# Altium PCB LCD_Board_2.PcbDoc (part 1 of 2)
Units mm, origin at the board's own origin, x right, y up, seen from the top; angles counter-clockwise.
Board outline 96.52 x 66.04 mm, 2 copper layers (Top Layer, Bottom Layer), stack 1.569 mm thick; 78 components, 60 nets, 337 pads, 81 vias.
Unrouted connection lines stored in the file: 77.
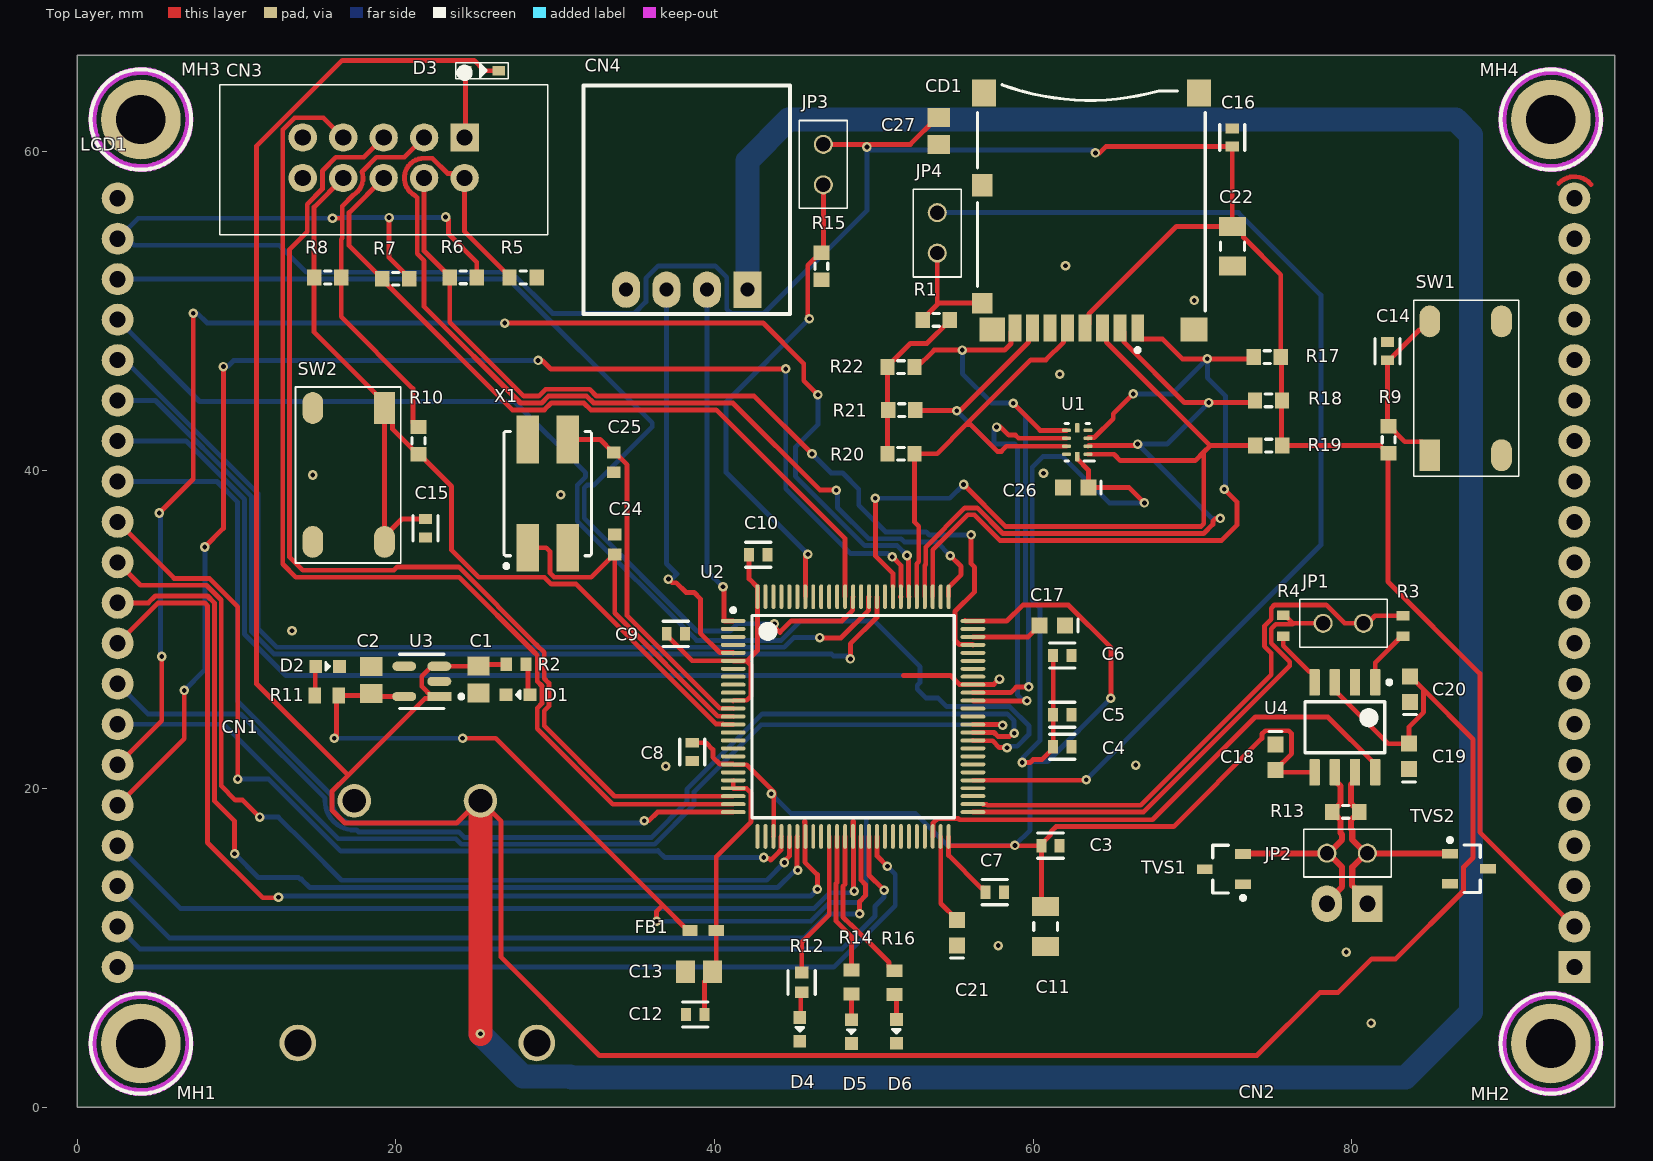
[diagram p0: Top Layer view]
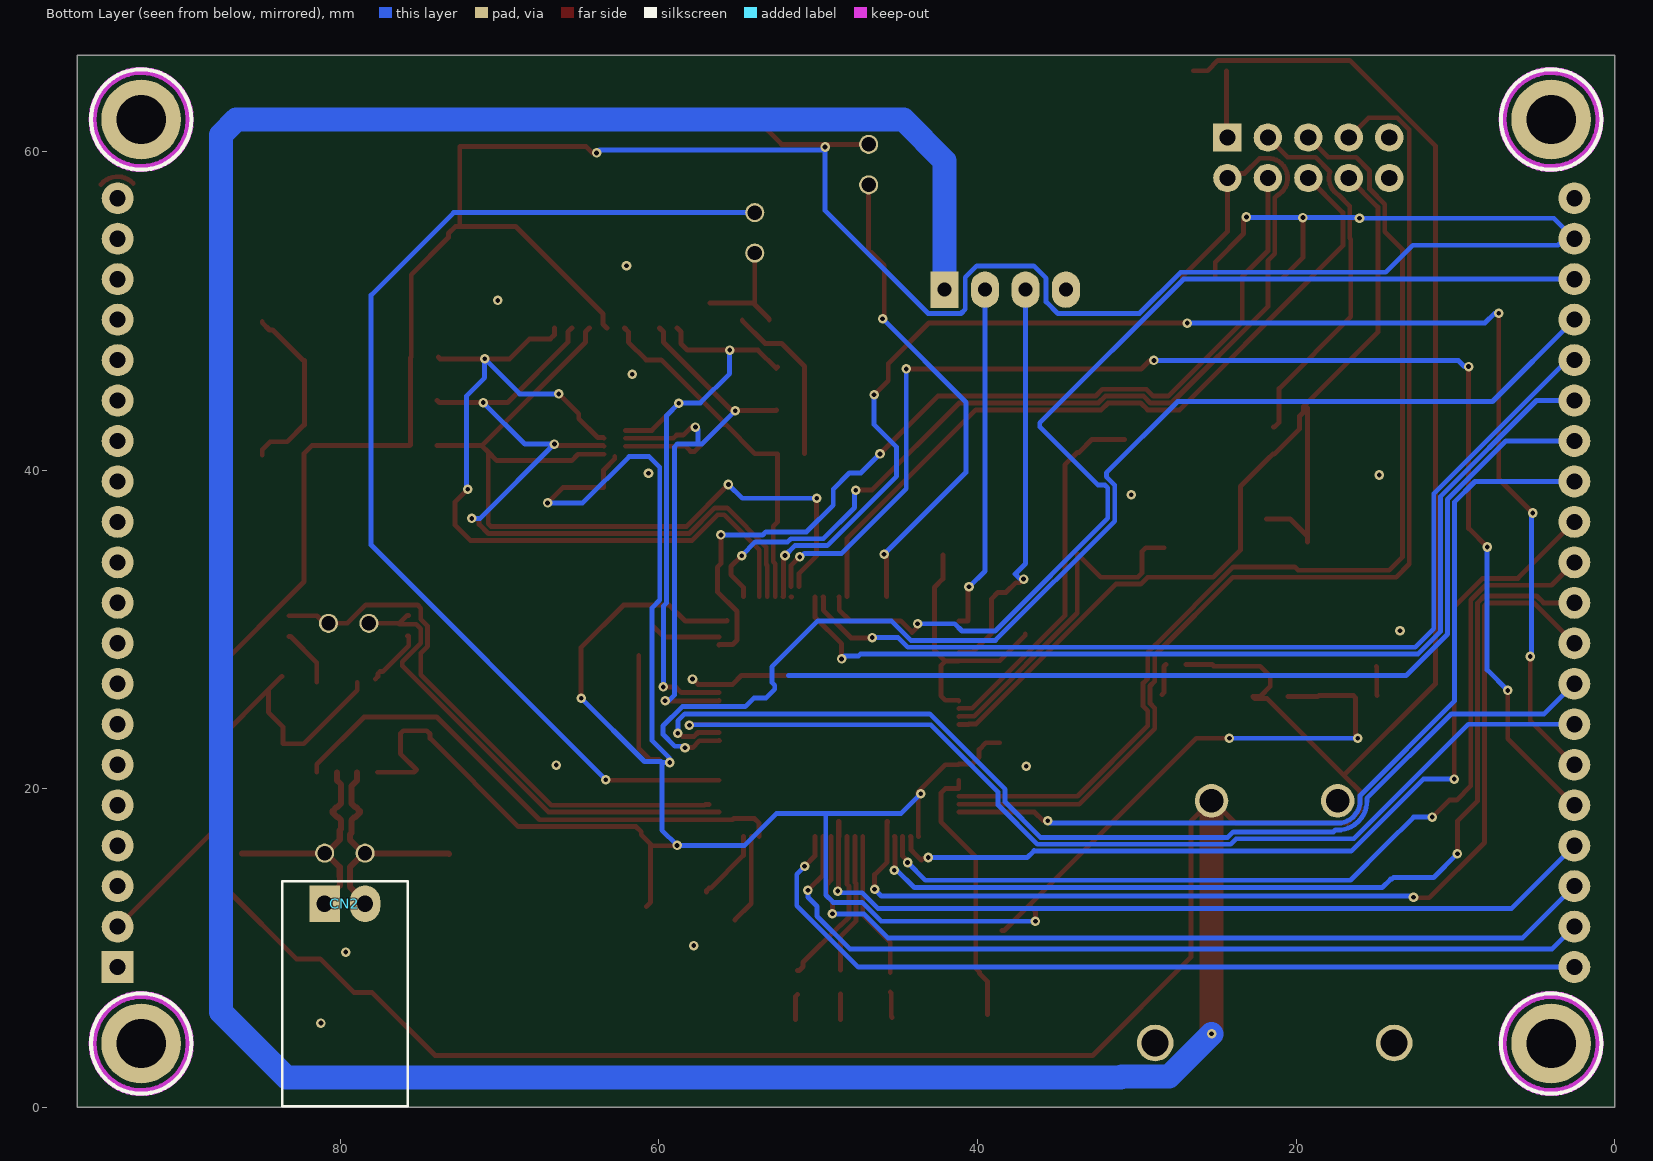
[diagram p1: Bottom Layer view, seen from below]
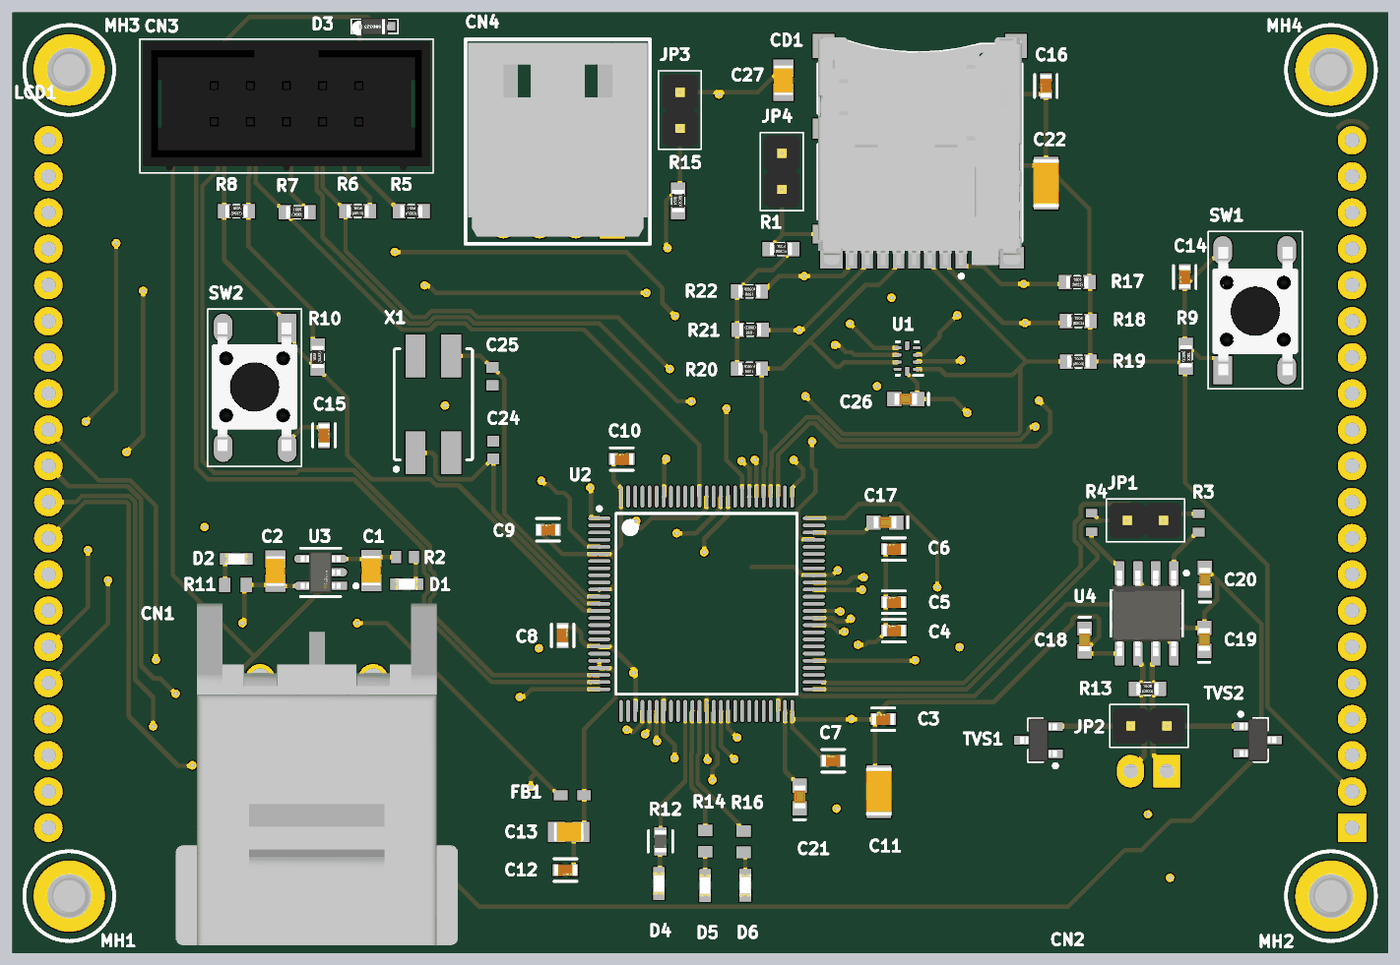
[diagram p2: 3D render of the assembled board from above, using the file's embedded part models]

## Layer stack, top to bottom
Top Solder: solder mask 0.0254, SM-001, Dk 4
Top Layer: signal copper 0.035
Dielectric 1: core 1.4986, Core-043, Dk 4.3
Bottom Layer: signal copper 0.035
Bottom Solder: solder mask 0.0254, SM-001, Dk 4

## Board outline
0,0 0,66.04 96.52,66.04 96.52,0

## Design rules (kind name [scope] priority, off if disabled: settings)
Clearance [All] p1: gap=0.254 ignorepadtopadclearanceinfootprint=TRUE except(0: Arc-Hole Track-Hole SMDPad-Hole THPad-Hole Via-Hole Fill-Hole Poly-Hole Region-Hole Text-Hole; 0.127: Arc-Arc Arc-Track Arc-Fill Arc-Poly Arc-Region Track-Track Track-Fill Track-Poly Track-Region SMDPad-SMDPad SMDPad-Fill SMDPad-Poly SMDPad-Region Fill-Fill Fill-Poly Fill-Region Poly-Poly Poly-Region Region-Region; 0.2: Arc-SMDPad Arc-THPad Track-SMDPad Track-THPad; 0.54: THPad-THPad THPad-Fill THPad-Poly THPad-Region)
ComponentClearance [All] p1: gap=0.254 collisioncheckmode=3 verticalgap=2540 showdistances=FALSE
DiffPairsRouting [All] p1: maxlimit=0.254 minlimit=0.254 mostfreqgap=0.254 toplayer_minwidth=0.381 toplayer_maxwidth=0.381 toplayer_prefwidth=0.381 bottomlayer_minwidth=0.381 bottomlayer_maxwidth=0.381 bottomlayer_prefwidth=0.381 substack1={F4272AB1-54B0-470A-9504-83E776850737} toplayer_{f4272ab1-54b0-470a-9504-83e776850737}_minwidth=0.381 toplayer_{f4272ab1-54b0-470a-9504-83e776850737}_maxwidth=0.381 toplayer_{f4272ab1-54b0-470a-9504-83e776850737}_prefwidth=0.381 bottomlayer_{f4272ab1-54b0-470a-9504-83e776850737}_minwidth=0.381 bottomlayer_{f4272ab1-54b0-470a-9504-83e776850737}_maxwidth=0.381 bottomlayer_{f4272ab1-54b0-470a-9504-83e776850737}_prefwidth=0.381 substack2={EA747935-8F46-47CB-AC01-D5D24FED16BF} toplayer_{ea747935-8f46-47cb-ac01-d5d24fed16bf}_minwidth=0.381 toplayer_{ea747935-8f46-47cb-ac01-d5d24fed16bf}_maxwidth=0.381 toplayer_{ea747935-8f46-47cb-ac01-d5d24fed16bf}_prefwidth=0.381 bottomlayer_{ea747935-8f46-47cb-ac01-d5d24fed16bf}_minwidth=0.381 bottomlayer_{ea747935-8f46-47cb-ac01-d5d24fed16bf}_maxwidth=0.381 bottomlayer_{ea747935-8f46-47cb-ac01-d5d24fed16bf}_prefwidth=0.381 substack3={627328DA-F39E-4214-9B17-F8342BBCFC59} toplayer_{627328da-f39e-4214-9b17-f8342bbcfc59}_minwidth=0.381 toplayer_{627328da-f39e-4214-9b17-f8342bbcfc59}_maxwidth=0.381 toplayer_{627328da-f39e-4214-9b17-f8342bbcfc59}_prefwidth=0.381 bottomlayer_{627328da-f39e-4214-9b17-f8342bbcfc59}_minwidth=0.381 bottomlayer_{627328da-f39e-4214-9b17-f8342bbcfc59}_maxwidth=0.381 bottomlayer_{627328da-f39e-4214-9b17-f8342bbcfc59}_prefwidth=0.381 substack4={10BF810F-735D-4ED9-9BE4-32E110BF4F33} toplayer_{10bf810f-735d-4ed9-9be4-32e110bf4f33}_minwidth=0.381 toplayer_{10bf810f-735d-4ed9-9be4-32e110bf4f33}_maxwidth=0.381 toplayer_{10bf810f-735d-4ed9-9be4-32e110bf4f33}_prefwidth=0.381 bottomlayer_{10bf810f-735d-4ed9-9be4-32e110bf4f33}_minwidth=0.381 bottomlayer_{10bf810f-735d-4ed9-9be4-32e110bf4f33}_maxwidth=0.381 bottomlayer_{10bf810f-735d-4ed9-9be4-32e110bf4f33}_prefwidth=0.381 maxuncoupledlength=12.7
PolygonConnect [All] p1: connectstyle=Relief reliefconductorwidth=0.254 reliefentries=4 polygonreliefangle="90 Angle" airgapwidth=0.254
RoutingVias [All] p1: holewidth=0.3 width=0.6 viastyle="Through Hole" minholewidth=0.2 minwidth=0.45 maxholewidth=1.5 maxwidth=3
SolderMaskExpansion [All] p1: expansion=0.102 istentingtop=FALSE
Width [All] p1: maxlimit=2 minlimit=0.127 preferedwidth=0.305 toplayer_prefwidth=0.305 substack1={F4272AB1-54B0-470A-9504-83E776850737} substack2={EA747935-8F46-47CB-AC01-D5D24FED16BF} substack3={627328DA-F39E-4214-9B17-F8342BBCFC59} substack4={10BF810F-735D-4ED9-9BE4-32E110BF4F33} minimp=50.000000 maximp=50.000000 favimp=50.000000
28 further rules are at their usual default settings.

## Classes and differential pairs
component class U_micro: C3 C4 C5 C6 C7 C8 C9 C10 C11 C12 C13 C14 C15 C17 C21 C24 C25 CN3 D3 D4 D5 D6 FB1 JP3 MH1 MH2 MH3 MH4 R5 R6 R7 R8 R9 R10 R12 R14 R15 R16 SW1 SW2 U2 X1
component class Power: C1 C2 CN1 D1 D2 R2 R11 U3
component class LED_LCD: C16 C22 C26 C27 CD1 CN4 JP4 R1 R17 R18 R19 R20 R21 R22 U1
component class "CAN interface": C18 C19 C20 CAN1 CN2 J1 JP1 JP2 R3 R4 R13 TVS1 TVS2 U4
differential pair CAN2: +CAN2_N -CAN2_P

## Components (designator, comment, footprint, x,y, rotation, side; value= is the part's Value field where it differs from the comment)
C1 "CL21B105KBFNNNG" "0803 CAP" 25.187,26.858 r270 top
C2 "CL21B105KBFNNNG" "0803 CAP" 18.456,26.819 r90 top
C3 "CL10B104JB8NNNC" FP-CL10-0_1-MFG#1 61.096,16.418 r180 top
C4 "CL10B104JB8NNNC" FP-CL10-0_1-MFG#1 61.84,22.631 r180 top
C5 "CL10B104JB8NNNC" FP-CL10-0_1-MFG#1 61.84,24.638 r180 top
C6 "CL10B104JB8NNNC" FP-CL10-0_1-MFG#1 61.84,28.359 r180 top
C7 "CL10B104JB8NNNC" FP-CL10-0_1-MFG#2 57.591,13.5 r180 top
C8 "CL10B104JB8NNNC" FP-CL10-0_1-MFG#2 38.608,22.305 r90 top
C9 "CL10B104JB8NNNC" FP-CL10-0_1-MFG#2 37.583,29.718 r180 top
C10 "CL10B104JB8NNNC" FP-CL10-0_1-MFG#1 42.757,34.684 r180 top
C11 "CL31B106KBHNNNE" CAPC3216X180X50LL20T30 60.795,11.348 r90 top
C12 "CL10B104JB8NNNC" FP-CL10-0_1-MFG#1 38.806,5.829 r0 top
C13 "CL21B105KBFNNNG" "0803 CAP" 39.039,8.509 r0 top
C14 "CL10B104JB8NNNC" FP-CL10-0_1-MFG#1 82.245,47.463 r270 top
C15 "CL10B104JB8NNNC" FP-CL10-0_1-MFG#1 21.869,36.351 r90 top
C16 "CL10B104JB8NNNC" FP-CL10-0_1-MFG#1 72.504,60.873 r270 top
C17 "2.2uF, 50V, 0603 SMD, X5R, Ceramic" "CAPC1608N(0603\")" 61.214,30.239 r180 top value=2.2µF
C18 "0.1μF" "CAPC1608N(0603\")" 75.222,21.982 r270 top
C19 "1μF" "CAPC1608N(0603\")" 83.604,22.02 r90 top
C20 "0.1μF" "CAPC1608N(0603\")" 83.668,26.249 r90 top
C21 "2.2uF, 50V, 0603 SMD, X5R, Ceramic" "CAPC1608N(0603\")" 55.232,10.96 r90 top value=2.2µF
C22 "CL31B106KBHNNNE" CAPC3216X180X50LL20T30 72.517,54.044 r90 top
C24 "16pF Ceramic 50V 5% 0603" CAPC1608X90X35LL10T15 33.744,35.316 r270 top
C25 "16pF Ceramic 50V 5% 0603" CAPC1608X90X35LL10T15 33.68,40.485 r90 top
C26 "10 nF, 50V 0603 SMD, Ceramic" "CAPC1608N(0603\")" 62.675,38.898 r180 top value=10nF
C27 "CL21B105KBFNNNG" "0803 CAP" 54.089,61.276 r90 top
CD1 "502774-0891" MOLX-502774-0891_V 63.665,56.299 r180 top
CN1 "2x1, Male header, Right Angle, Latch holder" "2X1 Power Connector 90 degrees" 25.314,19.238 r180 top
CN2 "1x2 Shrouded Right Angle" "2X1 Female Header" 80.986,12.776 r90 bottom
CN3 "ST Debug Header 10-pin THT" "10-pin shrouded header THT" 24.32,60.871 r180 top
CN4 "Header, Male, 1x4, RA, Pitch 0.1\" (2.54mm)" "HEADER, MALE, SHROUDED, 4x1, PITCH 0.1\" (2.54mm), RA" 42.075,51.321 r270 top
D1 "LT Q39G-Q1OO-25-1" FP-LB_Q39E-MFG 27.673,25.895 r0 top
D2 "LT Q39G-Q1OO-25-1" FP-LB_Q39E-MFG 15.723,27.673 r180 top
D3 "CUS08F30,H3F" SC-76 25.417,65.062 r0 top
D4 "LSQ976-NR-1" FP-LB_Q39E-MFG 45.364,4.889 r90 top
D5 "LT Q39G-Q1OO-25-1" FP-LB_Q39E-MFG 48.603,4.75 r90 top
D6 "LBQ39E-N1OO-35-1" FP-LB_Q39E-MFG 51.422,4.763 r90 top
FB1 "BLM18AG601SN1D" MURA-BLM18-F-H1-CHIP-2_V 39.291,11.087 r0 top
JP1 "1x2 Male Header" "2X1 Males Header" 80.747,30.377 r180 top
JP2 "1x2 Male Header" "2X1 Males Header" 80.988,15.951 r180 top
JP3 "1x2 Male Header" "2X1 Males Header" 46.838,60.439 r270 top
JP4 "1x2 Male Header" "2X1 Males Header" 53.988,53.618 r90 top
LCD1 "Adafruit 2050" LCD_touchscreen_tft 93.98,8.801 r180 top locked
MH1 "Mount_Hole_3mm" Mount-Hole_3mm 4,4 r0 top locked
MH2 "Mount_Hole_3mm" Mount-Hole_3mm 92.5,4 r0 top locked
MH3 "Mount_Hole_3mm" Mount-Hole_3mm 4,62 r0 top locked
MH4 "Mount_Hole_3mm" Mount-Hole_3mm 92.5,62 r0 top locked
R1 "10kR, 1%, 1/10W, 0603 SMD" "RESC1608N(0603\")" 53.923,49.427 r0 top value=10k
R2 "ERJ-3EKF5360V" RESC1608X55X30LL15T15 27.556,27.8 r0 top
R3 "RC0603FR-0733RL" RESC1608X55X25LL10T15 83.223,30.201 r270 top
R4 "RC0603FR-0733RL" RESC1608X55X25LL10T15 75.705,30.227 r270 top
R5 "10kR, 1%, 1/10W, 0603 SMD" "RESC1608N(0603\")" 27.992,52.083 r0 top value=10k
R6 "10kR, 1%, 1/10W, 0603 SMD" "RESC1608N(0603\")" 24.234,52.095 r0 top value=10k
R7 "10kR, 1%, 1/10W, 0603 SMD" "RESC1608N(0603\")" 19.991,52.006 r0 top value=10k
R8 "10kR, 1%, 1/10W, 0603 SMD" "RESC1608N(0603\")" 15.723,52.083 r0 top value=10k
R9 "10kR, 1%, 1/10W, 0603 SMD" "RESC1608N(0603\")" 82.321,41.898 r270 top value=10k
R10 "10kR, 1%, 1/10W, 0603 SMD" "RESC1608N(0603\")" 21.425,41.846 r90 top value=10k
R11 "RC0603FR-07110RL" RESC1608X55X25ML10T15 15.662,25.842 r180 top
R12 "CRCW0603330RFKEA" FP-CRCW0603-e3-IPC_C 45.479,7.841 r270 top
R13 "1k" "RESC1608N(0603\")" 79.628,18.542 r0 top
R14 "RC0603FR-07110RL" RESC1608X55X25ML10T15 48.616,7.862 r270 top
R15 "10kR, 1%, 1/10W, 0603 SMD" "RESC1608N(0603\")" 46.711,52.795 r90 top value=10k
R16 "RC0603FR-07110RL" RESC1608X55X25ML10T15 51.308,7.824 r270 top
R17 "10kR, 1%, 1/10W, 0603 SMD" "RESC1608N(0603\")" 74.702,47.092 r0 top value=10k
R18 "10kR, 1%, 1/10W, 0603 SMD" "RESC1608N(0603\")" 74.778,44.374 r0 top value=10k
R19 "10kR, 1%, 1/10W, 0603 SMD" "RESC1608N(0603\")" 74.789,41.529 r0 top value=10k
R20 "10kR, 1%, 1/10W, 0603 SMD" "RESC1608N(0603\")" 51.714,41.021 r180 top value=10k
R21 "10kR, 1%, 1/10W, 0603 SMD" "RESC1608N(0603\")" 51.764,43.764 r180 top value=10k
R22 "10kR, 1%, 1/10W, 0603 SMD" "RESC1608N(0603\")" 51.714,46.457 r180 top value=10k
SW1 "PTS645SL43SMTR92LFS" 4-SPST-NO 84.906,41.128 r90 top
SW2 "PTS645SL43SMTR92LFS" 4-SPST-NO 19.291,43.688 r270 top
TVS1 "PESD36VS2UT,215" SOT95P245X110-3N 71.977,14.948 r180 top
TVS2 "PESD36VS2UT,215" SOT95P245X110-3N 87.37,14.971 r0 top
U1 "TPD6E001RSER" RSE0010A_V 62.778,41.741 r180 top
U2 "STM32F429VGT6" STM-LQFP100_L 48.704,24.524 r0 top
U3 "TLV75533PDBVR" FP-DBV0005A-IPC_B 21.631,26.731 r180 top
U4 "CAN Transceiver" 8-SOIC 79.578,23.851 r270 top
X1 "CRYSTAL 8.0MHZ 16PF SMD" QFN250P750X520X140_HS-5M 29.535,38.523 r90 top

## Footprints (in the part's own frame and the unit in brackets; to place one, negate y for a bottom-side part, rotate by r counter-clockwise, add the part's x,y. Pads: shape width x height; smd on the part's side, far side on the other; paste and mask are expansions set on the pad)
"2X1 Female Header" [mil]
  rect 90x75 hole 40: 1(0,0)
  oval 90x75 hole 40: 2(0,-100)
  silkscreen extent -500,-205 55,105, body extent -495,-200 40,100, height 273
"2X1 Males Header" [mm]
  round 1.2 hole 0.9: 1(0,0) 2(2.54,0)
  silkscreen extent -1.5,-1.5 4,1.5, body extent -1.27,-1.24 3.81,1.25, height 8.54
"2X1 Power Connector 90 degrees" [mm]
  round 2.1 hole 1.5: 1(0,0) 2(7.92,0)
  round 2.3 hole 1.7: 3(-3.54,15.2) 4(11.46,15.2)
  body extent -5.96,-5.32 13.84,18.68, height 13.56
4-SPST-NO [mm]
  rect 2x1.3 smd: 1(-0.2,0)
  oval 2x1.3 smd: 2(8.2,0) 3(-0.2,-4.5) 4(8.2,-4.5)
  silkscreen extent -1.52,-5.59 9.53,1.02, body extent -0.56,-5.29 8.44,0.71, height 5
8-SOIC [mm] "SOIC, 8-Leads, Body 5x4mm, Pitch 1.27mm, IPC Low Density"
  rrect15% 1.65x0.65 smd: 1(-2.825,1.905) 2(-2.825,0.635) 3(-2.825,-0.635) 4(-2.825,-1.905) 5(2.825,-1.905) 6(2.825,-0.635) 7(2.825,0.635) 8(2.825,1.905)
  silkscreen extent -2.95,-2.5 1.6,2.91, body extent -3,-2.45 3,2.45, height 1.63
"10-pin shrouded header THT" [mil]
  rect 70x70 hole 40: 1(0,0)
  round 70 hole 40: 2(100,0) 3(200,0) 4(300,0) 5(400,0) 6(0,100) 7(100,100) 8(200,100) 9(300,100) 10(400,100)
  silkscreen extent -205,-170 605,240, body extent -198,-124 598,234, height 358
"0803 CAP" [mm] "Chip Capacitor, 2-Leads, Body 2.00x1.25mm, IPC Medium Density"
  rect 1.2x1.4 smd: 1(-0.85,0) 2(0.85,0)
  body extent -1.05,-0.67 1.05,0.67, height 1.25
"CAPC1608N(0603\")" [mm] "Chip Capacitor, Body 1.6x0.8mm (0603\"), IPC Medium Density"
  rect 1x1 smd: 1(-0.8,0) 2(0.8,0)
  silkscreen extent -1.6,-0.4 -1.6,0.4, body extent -0.8,-0.4 0.8,0.4, height 0.9
CAPC1608X90X35LL10T15 [mm] "Chip Capacitor, 2-Leads, Body 1.60x0.80mm, IPC High Density"
  rect 0.75x0.85 smd: 1(-0.625,0) 2(0.625,0)
  body extent -0.85,-0.45 0.85,0.45, height 0.9
CAPC3216X180X50LL20T30 [mm] "Chip Capacitor, 2-Leads, Body 3.4x1.8mm, IPC High Density"
  rect 1.2x1.7 smd: 1(-1.25,0) 2(1.25,0)
  silkscreen extent -0.25,-0.75 0.25,0.75, body extent -1.7,-0.9 1.7,0.9, height 1.8
FP-CL10-0_1-MFG#1 [mm]
  rect 0.625x0.825 smd: 1(-0.575,0) 2(0.575,0)
  silkscreen extent -0.8,-0.79 0.8,0.79, body extent -0.99,-0.55 0.99,0.55, height 0.25
FP-CL10-0_1-MFG#2 [mm]
  rect 0.625x0.825 smd paste+0 mask+0: 1(-0.575,0) 2(0.575,0)
  silkscreen extent -0.8,-0.79 0.8,0.79, body extent -0.99,-0.55 0.99,0.55, height 0.25
FP-CRCW0603-e3-IPC_C [mm]
  rect 0.735x0.862 smd: 1(-0.615,0) 2(0.615,0)
  silkscreen extent -0.75,-0.85 0.75,0.85, body extent -1.08,-0.58 1.08,0.58, height 0.25
FP-DBV0005A-IPC_B [mm]
  rect 1.505x0.572 smd: 1(-1.1,0.95)
  rrect100% 1.505x0.572 smd: 2(-1.1,0) 3(-1.1,-0.95) 4(1.1,-0.95) 5(1.1,0.95)
  silkscreen extent -2.6,-1.7 1.4,1.7, body extent -2.1,-1.7 2.1,1.7, height 0.25
FP-LB_Q39E-MFG [mm]
  rect 0.8x0.8 smd: 1(-0.75,0) 2(0.75,0)
  silkscreen extent -0.13,-0.25 0.13,0.25, body extent -1.25,-0.55 1.25,0.55, height 0.25
"HEADER, MALE, SHROUDED, 4x1, PITCH 0.1\" (2.54mm), RA" [mil]
  rect 90x70 hole 35: 1(0,0)
  oval 90x70 hole 35: 2(0,-100) 3(0,-200) 4(0,-300)
  silkscreen extent -505,-405 60,105, body extent -495,-397 40,97, height 270
LCD_touchscreen_tft [mm]
  rect 2x2 hole 1.02: 1(0,0)
  round 2 hole 1.02: 2(0,-2.54) 3(0,-5.08) 4(0,-7.62) 5(0,-10.16) 6(0,-12.7) 7(0,-15.24) 8(0,-17.78) 9(0,-20.32) 10(0,-22.86) 11(0,-25.4) 12(0,-27.94) 13(0,-30.48) 14(0,-33.02) 15(0,-35.56) 16(0,-38.1) 17(0,-40.64) 18(0,-43.18) 19(0,-45.72) 20(0,-48.26) 21(91.44,-48.26) 22(91.44,-45.72) 23(91.44,-43.18) 24(91.44,-40.64) 25(91.44,-38.1) 26(91.44,-35.56) 27(91.44,-33.02) 28(91.44,-30.48) 29(91.44,-27.94) 30(91.44,-25.4) 31(91.44,-22.86) 32(91.44,-20.32) 33(91.44,-17.78) 34(91.44,-15.24) 35(91.44,-12.7) 36(91.44,-10.16) 37(91.44,-7.62) 38(91.44,-5.08) 39(91.44,-2.54) 40(91.44,0)
MOLX-502774-0891_V [mm] "SMD, 14-Leads, Body 15x14.3mm, Pitch 1.1mm"
  rect 0.8x1.68 smd: 1(-2.9,7.385) 2(-1.8,7.385) 3(-0.7,7.385) 4(0.4,7.385) 5(1.5,7.385) 6(2.6,7.385) 7(3.7,7.385) 8(4.8,7.385)
  rect 1.29x1.3 smd: 9(6.855,5.825)
  rect 1.29x1.4 smd: 10(6.855,-1.575)
  rect 1.5x1.7 smd: 11(6.75,-7.375) 12(-6.75,-7.375)
  rect 1.7x1.5 smd: 13(-6.45,7.475)
  rect 1.6x1.5 smd: 14(6.21,7.475)
  silkscreen extent -7.15,-7.88 7.15,8.9, body extent -7.15,-8 7.15,8, height 1.78
Mount-Hole_3mm [mm]
  round 5 hole 3.1: 1(0,0)
  Keep-Out Layer circle w0.508: c0,0 r3.048
  silkscreen extent -3.15,-3.15 3.15,3.15, body extent -2.25,-2.6 2.25,2.6, height 4.19
MURA-BLM18-F-H1-CHIP-2_V [mm] "Chip Ferrite Bead, 2-Leads, Body 1.6x0.8mm, Height 0.95mm, Flow"
  rect 0.95x0.7 smd: 1(-0.825,0) 2(0.825,0)
  body extent -0.8,-0.4 0.8,0.4, height 0.95
QFN250P750X520X140_HS-5M [mm] "QFN, 4-Leads, Body 7.50x5.20mm, Pitch 2.50mm, Thermal Pad 4.10x1.10mm, IPC Low Density"
  rect 3x1.4 smd: 1(-3.4,1.25) 2(-3.4,-1.25) 3(3.4,-1.25) 4(3.4,1.25)
  silkscreen extent -4.67,-2.75 3.9,2.75, body extent -3.75,-2.6 3.75,2.6, height 1.4
"RESC1608N(0603\")" [mm] "Chip Resistor, Body 1.6x0.8mm (0603\"), IPC Medium Density"
  rect 0.9x1 smd: 1(-0.85,0) 2(0.85,0)
  silkscreen extent -0.2,-0.4 0.2,0.4, body extent -0.77,-0.42 0.78,0.43, height 0.44
RESC1608X55X25LL10T15 [mm] "Chip Resistor, 2-Leads, Body 1.60x0.80mm, IPC High Density"
  rect 0.6x0.8 smd: 1(-0.65,0) 2(0.65,0)
  body extent -0.85,-0.45 0.85,0.45, height 0.55
RESC1608X55X25ML10T15 [mm] "Chip Resistor, 2-Leads, Body 1.60x0.80mm, IPC Low Density"
  rect 0.8x1 smd: 1(-0.75,0) 2(0.75,0)
  body extent -0.85,-0.45 0.85,0.45, height 0.55
RESC1608X55X30LL15T15 [mm] "Chip Resistor, 2-Leads, Body 1.60x0.80mm, IPC High Density"
  rect 0.7x0.85 smd: 1(-0.625,0) 2(0.625,0)
  body extent -0.87,-0.48 0.87,0.48, height 0.55
RSE0010A_V [mm] "QFN, 10-Leads, Body 1.5x2mm, Pitch 0.5mm, TI Recommended"
  rrect50% 0.55x0.2 smd: 1(-0.675,0.75) 2(-0.675,0.25) 3(-0.675,-0.25) 4(-0.675,-0.75) 6(0.675,-0.75) 7(0.675,-0.25) 8(0.675,0.25) 9(0.675,0.75)
  rrect33% 0.3x0.6 smd: 5(0,-0.9) 10(0,0.9)
  silkscreen extent -1.07,-1.17 0.77,1.18, body extent -0.77,-1.02 0.78,1.03, height 0.61
SC-76 [mm]
  rect 0.8x0.6 smd: A(-1.05,0) K(1.05,0)
  silkscreen extent -1.65,-0.5 1.65,0.5, body extent -1.25,-0.65 1.25,0.6, height 0.9
SOT95P245X110-3N [mm] "SOT23, 3-Leads, Body 2.90x2.45mm, Pitch 0.95mm, IPC Medium Density"
  rect 1x0.6 smd: 1(-1.2,0.95) 2(-1.2,-0.95) 3(1.2,0)
  silkscreen extent -1.33,-1.5 0.7,1.92, body extent -1.3,-1.5 1.3,1.5, height 1.1
STM-LQFP100_L [mm] "Thin QFP, 100-Leads, Body 14x14mm, Pitch 0.5mm, IPC High Density"
  oval 1.55x0.25 smd: 1(-7.525,6) 2(-7.525,5.5) 3(-7.525,5) 4(-7.525,4.5) 5(-7.525,4) 6(-7.525,3.5) 7(-7.525,3) 8(-7.525,2.5) 9(-7.525,2) 10(-7.525,1.5) 11(-7.525,1) 12(-7.525,0.5) 13(-7.525,0) 14(-7.525,-0.5) 15(-7.525,-1) 16(-7.525,-1.5) 17(-7.525,-2) 18(-7.525,-2.5) 19(-7.525,-3) 20(-7.525,-3.5) 21(-7.525,-4) 22(-7.525,-4.5) 23(-7.525,-5) 24(-7.525,-5.5) 25(-7.525,-6) 51(7.525,-6) 52(7.525,-5.5) 53(7.525,-5) 54(7.525,-4.5) 55(7.525,-4) 56(7.525,-3.5) 57(7.525,-3) 58(7.525,-2.5) 59(7.525,-2) 60(7.525,-1.5) 61(7.525,-1) 62(7.525,-0.5) 63(7.525,0) 64(7.525,0.5) 65(7.525,1) 66(7.525,1.5) 67(7.525,2) 68(7.525,2.5) 69(7.525,3) 70(7.525,3.5) 71(7.525,4) 72(7.525,4.5) 73(7.525,5) 74(7.525,5.5) 75(7.525,6)
  oval 0.25x1.55 smd: 26(-6,-7.525) 27(-5.5,-7.525) 28(-5,-7.525) 29(-4.5,-7.525) 30(-4,-7.525) 31(-3.5,-7.525) 32(-3,-7.525) 33(-2.5,-7.525) 34(-2,-7.525) 35(-1.5,-7.525) 36(-1,-7.525) 37(-0.5,-7.525) 38(0,-7.525) 39(0.5,-7.525) 40(1,-7.525) 41(1.5,-7.525) 42(2,-7.525) 43(2.5,-7.525) 44(3,-7.525) 45(3.5,-7.525) 46(4,-7.525) 47(4.5,-7.525) 48(5,-7.525) 49(5.5,-7.525) 50(6,-7.525) 76(6,7.525) 77(5.5,7.525) 78(5,7.525) 79(4.5,7.525) 80(4,7.525) 81(3.5,7.525) 82(3,7.525) 83(2.5,7.525) 84(2,7.525) 85(1.5,7.525) 86(1,7.525) 87(0.5,7.525) 88(0,7.525) 89(-0.5,7.525) 90(-1,7.525) 91(-1.5,7.525) 92(-2,7.525) 93(-2.5,7.525) 94(-3,7.525) 95(-3.5,7.525) 96(-4,7.525) 97(-4.5,7.525) 98(-5,7.525) 99(-5.5,7.525) 100(-6,7.525)
  silkscreen extent -7.65,-6.35 6.35,6.8, body extent -7,-7 7,7, height 1.6

## Part data
C1 C2 C13 C27: library part CMP-00005-3, "SAMSUNG ELECTRO-MECHANICS - CL21B105KBFNNNG - MLCC CAPACITORS", Capacitance=1uF, Case Code (Imperial)=0805, Case Code (Metric)=2012, Dielectric=X7R, Max Operating Temperature=125°C, Min Operating Temperature=-55°C, Package Quantity=3000, Tolerance=10%, Voltage=50V, Case/Package=0805, Contact Plating=Tin, Depth=1.25mm, Length=2mm, Material=Ceramic, Mount="Surface Mount", Packaging="Tape and Reel", Termination=Wraparound, Thickness=0.053inch, Voltage Rating=50V, Width=0.049inch
C3 C4 C5 C6 C7 C8 C9 C10 C12 C14 C15 C16: library part CMP-00000-3, "CAP CER 0.1UF 50V X7R 0603", Capacitance=0.1uF, Case Code (Imperial)=0603, Case Code (Metric)=1608, Dielectric=X7R, Max Operating Temperature=125°C, Min Operating Temperature=-55°C, Package Quantity=1, Tolerance=5%, Voltage=50V, Case/Package=0603, Contact Plating=Tin, Depth=0.8mm, Height=0.8mm, Length=1.6mm, Material=Ceramic, Mount="Surface Mount", Packaging="Tape and Reel", Radiation Hardening=No, Thickness=0.035inch, Voltage Rating=50V, Width=0.031inch
C11 C22: library part CMP-00004-1, "Cap Ceramic 10uF 50V X7R 10% Pad SMD 1206 125°C T/R", Capacitance=10uF, Case Code (Imperial)=1206, Case Code (Metric)=3216, Dielectric=X7R, Max Operating Temperature=125°C, Min Operating Temperature=-55°C, Tolerance=10%, Voltage Rating=50V, Case/Package=1206, Lead Free="Lead Free", Length=0.126inch, Mount="Surface Mount", Packaging="Tape and Reel", Thickness=0.071inch, Voltage Rating (DC)=50V, Width=0.063inch
C17 C21: library part CMP-006-0030-1, "Capacitor, Ceramic, 50V, 10%, 0603 SMD, X5R", Component Type=Standard, Design Item ID="2.2uF, 50V, 0603 SMD, X5R, Ceramic", PackageDescription="Chip Capacitor", Pin Count=2, Publisher=AUVic, Source=AUVic_Schematic_Library_Capacitors.SchLib
C18 C20: library part "0.1uF 16V 0603 SMD, Ceramic", "Capacitor, Ceramic, 16V, +/- 10%, 0603 SMD, X7R", Supplier Part Number 1=1276-1005-1-ND, Created By="Andy Bates", PackageDescription="Chip Capacitor", Published=16-04-26, Publisher=AUVic, Supplier 1=Digi-Key
C19: library part "1uF 50V 0603 SMD, Ceramic", "Capacitor, Ceramic, 50V, +/- 10%, 0603 SMD, X5R", Supplier Part Number 1=1276-1860-1-ND, Created By="Lyden Smith", Date Created=2017-10-26, PackageDescription="Chip Capacitor", Supplier 1=Digi-Key
C24 C25: library part CMP-00087-2, "Cap Ceramic 16pF 50V C0G 5% SMD 0603 125C Paper T/R", Capacitance=16pF, Case Code (Imperial)=0603, Case Code (Metric)=1608, Dielectric=C0G, Max Operating Temperature=125°C, Min Operating Temperature=-55°C, Package Quantity=1, Temperature Coefficient=30ppm/°C, Tolerance=5%, Voltage=50V, Case/Package=0603, Depth=0.8mm, Height=0.8mm, Lead Free="Lead Free", Length=1.6mm, Mount="Surface Mount", Packaging="Tape and Reel", Radiation Hardening=No, Termination=SMD/SMT, Thickness=0.035inch, Voltage Rating=50V, Voltage Rating (DC)=50V, Width=0.8mm
C26: library part CMP-006-0010-1, "Capacitor, Ceramic, 50V, +/- 10%, 0603 SMD", Component Type=Standard, Created By=Gabriel, Design Item ID="10 nF, 50V 0603 SMD, Ceramic", MFG=Samsung, MFG#=GRM188R61A475KE15D, PackageDescription="Chip Capacitor", Pin Count=2, Published=16-06-23, Publisher=AUVic, Source=AUVic_Schematic_Library_Capacitors.SchLib
CD1: library part CMP-2000-05248-1, "Micro SD Memory Card Connector, 0.5 A, 10 V (DC), -25 to 85 degC, 8-Pin SMT, RoHS, Tape and Reel", Manufacturer=Molex, Standard Package=1, 3D Model=502774-0891.stp, Card Type=SecureDigital-microSD™, Catalog Drawings=502774-0891, Category=Connectors,Interconnects, Connector Type=ConnectorandEjector, Contact Finish=Gold, Contact Finish Thickness=20µin(0.51µm), Datasheet URL=https://datasheet.ciiva.com/1104/1499551-1104671.pdf, Datasheet Version="Rev. D, 04/2004", Ejector Side=-, Family=MemoryConnectors-PCCardSockets, Features=Switch, Height Above Board="0.071\"(1.80mm)", Insertion, Removal Method=PushIn,PushOut, Manufacturer URL=http://www.molex.com/, Mounting Feature=Reverse-Bottom, Mounting Type=SurfaceMount,RightAngle, Number of Positions=10(8+2), Online Catalog=microSD™Series, Other Names=WM24066DKR, Packaging=Digi-Reel, RoHS Information=502774-0891CertofCompliance, Series=502774
CN1: library part CMP-005-0009-1, "Connector Header Through Hole, Right Angle 2 position 0.312\" (7.92mm)", Component Type=Standard, ComponentLink1Description="Digikey (male)", ComponentLink1URL=https://www.digikey.ca/product-detail/en/hirose-electric-co-ltd/DF22R-2P-7.92DS-05/H10706-ND/1025057, ComponentLink2Description="Digikey (female)", ComponentLink2URL=https://www.digikey.ca/product-detail/en/hirose-electric-co-ltd/DF22R-2S-7.92C-28/H1615-ND/510248, ComponentLink3Description="Digikey (crimp)", ComponentLink3URL=https://www.digikey.ca/product-detail/en/hirose-electric-co-ltd/DF22-1416SCF/H2788CT-ND/365031, Design Item ID="2x1, Male header, Right Angle, Latch holder", Made By="Robert Keen", Made on=2018-08-16, Pin Count=2, Source=AUVic_Schematic_Library_Connectors.SchLib
CN2: library part CMP-00010-3, "02 MTE HDR SRRA LATCH", Color=Black, Contact Current Rating=3A, Contact Resistance=15mR, Flammability Rating="UL94 V-0", Insulation Resistance=5GR, Max Operating Temperature=105°C, Min Operating Temperature=-65°C, Package Quantity=68, Approvals=CSA, Backwall/Post Interruptions="No (Without)", Connector Type=Plug,Header,Pin, Contact Gender=Male, Contact Material=Brass, Contact Mating Length=0.23inch, Contact Plating=Gold,Tin,Matte, Contact Retention="Yes (With)", Contact Shape=Square, Current Rating=3A, Depth=13.59mm, ELV=Compliant, Gender=Male, Height=13.59mm, Housing Color=Black, Housing Material=Thermoplastic, Lead Free="Lead Free", Length=7.62mm, Mating Alignment="Yes (With)", Mating Retention="Yes (With)", Mount="Through Hole", Number of Contacts=2, Number of Positions=2, Number of Rows=1, Orientation="Right Angle", Packaging=Rail/Tube, PCB Mount Alignment="No (Without)", PCB Mount Retention=Without, PCB Mounting Orientation="Right Angle", PCB Thickness=0.062inch, Pitch=2.54mm, REACH SVHC=Unknown, Row Spacing=0.1inch, Strain Relief="No (Without)", Tail Length=3.3mm, Termination=Crimp
CN3: library part CMP-00011-6, "CONN HEADER VERT 10POS 2.54MM", Color=Black, Package Quantity=1, Connector Type="Male Pin", Contact Plating=Gold, Lead Free="Lead Free", Mount="Through Hole", Number of Positions=10, Number of Rows=2, Packaging=Tray, Pitch=0.1inch, Row Spacing=0.1inch, Termination=Solder
CN4: library part CMP-005-0029-3, "Connector Header Through Hole, Right Angle 4 position 0.100\" (2.54mm)", Component Type=Standard, Created By="Miguel Manguerra", Created On=2020-05-20, Design Item ID="Header, Male, 1x4, RA, Pitch 0.1\" (2.54mm)", Pin Count=4, Source=AUVic_Schematic_Library_Connectors.SchLib
D1 D2 D5: library part CMP-00064-3, "LED GREEN DIFFUSED 0603 SMD", Case/Package=SMD/SMT, Color=Green, Forward Current=15mA, Forward Voltage=2.85V, Max Operating Temperature=85°C, Min Operating Temperature=-40°C, Reverse Voltage=5V, Test Current=5mA, Depth=0.9mm, Dominant Wavelength=530nm, Length=1.7mm, Lens Style=Diffused,Colorless,Rectangular, Luminous Flux=0.55lm, Luminous Intensity=280mcd, Mount="Surface Mount", Number of Elements=1, Number of LEDs=1, Number of Pins=2, Packaging="Tape and Reel", Radiation Hardening=No
D3: library part CMP-057-0000-2, "Diode Schottky 30V 800mA Surface Mount USC", Average Rectified Current=800mA, Case/Package=SOD, Max Operating Temperature=125°C, Max Repetitive Reverse Voltage (Vrrm)=30V, Min Operating Temperature=-55°C, Peak Non-Repetitive Surge Current=5A, Peak Reverse Current=50uA, Contact Plating=Tin,Silver, Element Configuration=Single, Max Reverse Voltage (DC)=30V, Mount="Surface Mount", Number of Pins=2, Packaging="Tape and Reel"
D4: library part CMP-00066-2, "LED Red 645nm 2-Pin Chip 0603(1608Metric) T/R", Case Code (Imperial)=0603, Case Code (Metric)=1608, Color=Red, Forward Current=25mA, Forward Voltage=2.5V, Lens Color=White, Max Operating Temperature=85°C, Min Operating Temperature=-30°C, Package Quantity=1, Power Dissipation=65mW, Reverse Voltage=12V, Test Current=20mA, Case/Package=0603, Depth=0.9mm, Dominant Wavelength=633nm, Height=0.8mm, Illumination Color=Red, Length=1.7mm, Lens Size=0.8mm, Lens Style=Diffused,Flat,Colorless,Rectangular, Lens Transparency=Diffused, Luminous Flux=0.33lm, Luminous Intensity=180mcd, Mount="Surface Mount", Number of Elements=1, Number of LEDs=1, Number of Pins=2, Packaging="Tape and Reel", Radiation Hardening=No, Viewing Angle=160°, Width=0.8mm
D6: library part CMP-00063-3, "LED BLUE DIFFUSED 0603 SMD", Case Code (Imperial)=0603, Case Code (Metric)=1608, Color=Blue, Forward Voltage=2.85V, Lens Color=White, Test Current=5mA, Case/Package=0603, Dominant Wavelength=470nm, Height=0.4mm, Length=1.6mm, Lens Size=0.8mm, Lens Style=Flat,Diffused,Colorless,Rectangular, Lens Transparency=Diffused, Luminous Flux=0.13lm, Luminous Intensity=42mcd, Mount="Surface Mount", Number of LEDs=1, Number of Pins=2, Packaging="Tape and Reel", Radiation Hardening=No, Viewing Angle=130°, Width=0.8mm
FB1: library part CMP-00016-1, "MURATA - BLM18AG601SN1D - Feritový Korálek, 0603 / 1608, 600 ohm, 500 mA, Série BLM18A, 0.38 ohm, ± 25%", Case Code (Imperial)=0603, Case Code (Metric)=1608, Current Rating=500mA, DC Resistance (DCR)=380mR, Frequency=100MHz, Max Operating Temperature=125°C, Min Operating Temperature=-55°C, Package Quantity=1, Tolerance=25%, Case/Package=0603, Core Material=Ferrite, DC Current=500mA, Depth=0.8mm, Height=0.8mm, Impedance=600R, Lead Free="Lead Free", Length=1.6mm, Material=Steel,Ferrite, Max Current Rating=500mA, Max DC Current=500mA, Military Standard=Not, Number of Circuits=1, Number of Lines=1, Number of Pins=2, Packaging="Tape and Reel", Radiation Hardening=No, REACH SVHC="No SVHC", Shielding=Unshielded, Termination=SMD/SMT, Test Frequency=100MHz, Weight=7.1E-05oz, Width=0.8mm
JP1 JP2 JP3 JP4: library part CMP-004-0001-1, Component Type=Standard, Design Item ID="1x2 Male Header", Made By="Andy Bates", Pin Count=2, Source=AUVic_Schematic_Library_Connectors.SchLib
LCD1: library part CMP-033-0000-4, "3.5\" TFT 320X480 TOUCHSCREEN", Component Type=Standard, ComponentLink1Description=Adafruit, ComponentLink1URL=https://www.adafruit.com/product/1743, ComponentLink2Description=Datasheet, ComponentLink2URL=https://cdn-shop.adafruit.com/datasheets/ILI9341.pdf, ComponentLink3Description="Raw LCD Datasheet", ComponentLink3URL=https://cdn-shop.adafruit.com/datasheets/MI0283QT-11+V1.1.PDF, ComponentLink4Description=DigiKey, ComponentLink4URL=https://www.digikey.ca/products/en/optoelectronics/display-modules-lcd-oled-graphic/107?k=&pkeyword=&pv652=165&FV=ffe0006b%2Cfffc05f8&quantity=0&ColumnSort=0&page=1&pageSize=25, ComponentLink5Description="Adafruit Guide", ComponentLink5URL=https://cdn-learn.adafruit.com/downloads/pdf/adafruit-2-dot-8-color-tft-touchscreen-breakout-v2.pdf, Design Item ID="Adafruit 2050", Pin Count=40, Source=AUVic_Integrated_Library_LCDs.SchLib
MH1 MH2 MH3 MH4: library part CMP-004-0010-4, "Mounting hold for M3 hex standoff", Component Type=Standard, Design Item ID=Mount_Hole_3mm, Pin Count=1, Source=AUVic_Schematic_Library_Connectors.SchLib
R1 R5 R6 R7 R8 R9 R10 R15 R17 R18 R19 R20 R21 R22: library part CMP-047-0013-1, Component Type=Standard, Created On=14-05-31, Design Item ID="10kR, 1%, 1/10W, 0603 SMD", Last Edited=14-05-31, Made By="Ashwin Sira", Owned By=AUVic, Pin Count=2, Source=AUVic_Schematic_Library_Resistors.SchLib
R2: library part CMP-00071-1, "SMD Chip Resistor, 0603 [1608 Metric], 536 ohm, ERJ3EK Series, 75 V, Thick Film, 100 mW", Case Code (Imperial)=0603, Case Code (Metric)=1608, Max Operating Temperature=155°C, Max Power Dissipation=100mW, Min Operating Temperature=-55°C, Package Quantity=1, Resistance=536R, Temperature Coefficient=100ppm/°C, Tolerance=1%, Voltage Rating=75V, Voltage Rating (DC)=50V, Case/Package=0603, Composition="Thick Film", Contact Plating=Tin, Depth=0.8mm, Features="Automotive AEC-Q200", Height=0.022inch, Lead Free="Lead Free", Length=1.6mm, Military Standard=Not, Mount="Surface Mount", Number of Terminations=2, Packaging="Tape and Reel", Power Rating=100mW, REACH SVHC="No SVHC", Termination=SMD/SMT, Width=0.8mm
R3 R4: library part CMP-00060-1, "Res Thick Film 0603 33 Ohm 1% 1/10W +/-100ppm/ßC Molded SMD Paper T/R", Case Code (Imperial)=0603, Case Code (Metric)=1608, Max Operating Temperature=155°C, Max Power Dissipation=100mW, Min Operating Temperature=-55°C, Package Quantity=1, Resistance=33R, Temperature Coefficient=100ppm/°C, Tolerance=1%, Voltage Rating=75V, Voltage Rating (DC)=50V, Case/Package=0603, Composition="Thick Film", Depth=0.8mm, Features="Moisture Resistant", Height=0.45mm, Lead Free="Lead Free", Lead Pitch=0.3mm, Length=1.6mm, Military Standard=Not, Number of Pins=2, Number of Terminations=2, Packaging="Tape and Reel", Power Rating=100mW, REACH SVHC="No SVHC", Termination=SMD/SMT, Weight=7.1E-05oz, Width=0.8mm
R11 R14 R16: library part CMP-00069-1, "RES SMD 110 OHM 1% 1/10W 0603", Case Code (Imperial)=0603, Case Code (Metric)=1608, Max Operating Temperature=155°C, Max Power Dissipation=100mW, Min Operating Temperature=-55°C, Package Quantity=1, Resistance=110R, Temperature Coefficient=100ppm/°C, Tolerance=1%, Voltage Rating=50V, Working Voltage=75V, Case/Package=0603, Composition="Thick Film", Depth=0.8mm, Features="Moisture Resistant", Height=0.022inch, Lead Free="Lead Free", Length=1.6mm, Military Standard=Not, Number of Terminations=2, Packaging="Tape and Reel", Power Rating=100mW, Termination=SMD/SMT, Voltage Rating (DC)=50V, Width=0.031inch
R12: library part CMP-00067-2, "Res Thick Film 0603 330 Ohm 1% 0.1W(1/10W) +/-100ppm/ßC Pad SMD Automotive T/R", Case Code (Imperial)=0603, Case Code (Metric)=1608, Max Operating Temperature=155°C, Max Power Dissipation=100mW, Min Operating Temperature=-55°C, Package Quantity=10, Resistance=330R, Temperature Coefficient=100ppm/°C, Tolerance=1%, Voltage Rating=75V, Case/Package=0603, Composition="Thick Film", Contact Plating=Tin, Depth=0.85mm, Features="Automotive AEC-Q200", Height=0.45mm, Lead Free="Lead Free", Length=1.55mm, Military Standard=Not, Mount="Surface Mount", Number of Terminations=2, Packaging="Tape and Reel", Power Rating=100mW, Radiation Hardening=No, REACH SVHC=Unknown, Termination=SMD/SMT, Voltage Rating (DC)=75V, Weight=7.1E-05oz, Width=0.033inch
R13: library part "1kR, 1%, 1/10W , 0603, SMD", "1kR, 1%, 1/10W , 0603, SMD", Supplier Part Number 1=311-1.00KHRCT-ND, Created By="Andy Bates", Date Created=2017-05-10, Publisher=AUVic, Supplier 1=Digikey
SW1 SW2: library part CMP-00077-1, "Black Switch Tactile N.O. SPST Round Button Gull Wing 0.05A 12VDC 100000Cycles 1.27N SMD T/R", Button Colour=Black, Contact Resistance=100mR, Current Rating=50mA, Max Operating Temperature=60°C, Max Voltage Rating (DC)=12V, Min Operating Temperature=-20°C, Operating Force=1.27N, Package Quantity=1000, Actuator Length=0.85mm, Actuator Material=Nylon,Polyamide, Actuator Type=Standard, Color=Black, Contact Material=Bronze,Brass,Silver, Contact Plating=Silver, Depth=9mm, Illumination Type=Non-Illuminated, Lead Free="Lead Free", Length=6mm, Max Current Rating=50mA, Mechanical Life=100000Cycles, Mount="Surface Mount", Orientation=Straight, Packaging="Tape and Reel", Switch Function=Off-Mom, Termination="Gull Wing", Throw Configuration=SPST, Voltage Rating (DC)=12V
TVS1 TVS2: "TVS DIODE 36V 60V SOT23", Supplier Part Number 1=1727-5397-1-ND, Created By="Miguel Manguerra", Date Created=2020-05-18, Supplier 1=Digi-Key
U1: library part CMP-0326-00011-3, "Low-Capacitance + / - 15 kV ESD Protection Array for High-Speed Data Interfaces, 6 Channels, -40 to +85 degC, 10-pin UQFN (RSE), Green (RoHS & no Sb/Br)", Breakdown Voltage(Min)(V)=11, IO Capacitance(Typ)(pF)=1.5, IO Leakage Current(nA)=1, Manufacturer="Texas Instruments", 1394 / Firewire=TRUE, ComponentLink1Description="Manufacturer URL", ComponentLink1URL=http://www.ti.com/, ComponentLink2Description=Datasheet, ComponentLink2URL=http://www.ti.com/general/docs/lit/getliterature.tsp?genericPartNumber=TPD6E001&fileType=pdf, ComponentLink3Description="URL Link1", ComponentLink3URL=SamplesURL:http://www.ti.com/product/tpd6e001#samples, DatasheetVersion=SLLS685C, Eco-Plan="Green (RoHS & no Sb/Br)", IEC 61000-4-2 Air-Gap(+/- kV)=15, IEC 61000-4-2 Contact(+/- kV)=8, Mounting Technology="Surface Mount", PackageDescription="10-Leads Plastic Quad Flatpack No-Lead, 2 x 1.5 x 0.55 mm Body, 0.5 mm Pitch", PackageReference=RSE0010A, PackageVersion="revD, Jan-2011", PartNumber=TPD6E001RSER, Serial ATA / eSATA=TRUE, SubFamily="ESD Solution", USB High Speed=TRUE
U2: library part CMP-00008-1, "MCU 32-bit STM32F ARM Cortex M4 RISC 1024KB Flash 2.5V/3.3V 100-Pin LQFP Tray", Case/Package=LQFP, Frequency=180MHz, Max Operating Temperature=85°C, Max Power Dissipation=465mW, Max Supply Voltage=3.6V, Min Operating Temperature=-40°C, Min Supply Voltage=1.8V, Package Quantity=540, Core Architecture=ARM, Data Bus Width=32b, Height=1.45mm, Interface=I2C,SPI,USB,CAN,IrDA,UART,USART,LIN,EBI/EMI,SDIO,Ethernet,I2S, Lead Free="Lead Free", Length=14.2mm, Max Frequency=180MHz, Memory Size=1MB, Memory Type=FLASH, Number of ADC Channels=24, Number of Ethernet Channels=1, Number of I2C Channels=3, Number of I/Os=82, Number of Pins=100, Number of Programmable I/O=82, Number of SPI Channels=6, Number of Timers/Counters=14, Number of UART Channels=4, Number of USB Channels=2, Oscillator Type=Internal, Packaging=Tray, Peripherals="Brown-out Detect/Reset,POR,PWM,WDT,DMA,LCD", Radiation Hardening=No, RAM Size=256KB, REACH SVHC="No SVHC", Watchdog Timer=Yes, Width=14.2mm
U3: library part CMP-044-0002-1, "500-mA, high-PSRR, low-IQ, low-dropout voltage regulator with enable 5-SOT-23 -40 to 125", Case/Package=SOT-23-5, Dropout Voltage=238mV, Max Input Voltage=5.5V, Max Operating Temperature=125°C, Max Output Voltage=3.3V, Min Operating Temperature=-40°C, Output Current=500mA, Power Supply Rejection Ratio (PSRR)=52dB, Quiescent Current=31uA, Min Output Voltage=3.3V, Mount="Surface Mount", Number of Regulators=1, Output Configuration=Positive, Output Type=Fixed, Packaging="Cut Tape"
U4: library part CMP-032-0000-2, "1/1 Transceiver Half CANbus 8-SO", Case/Package=SO, Max Operating Temperature=150°C, Max Supply Current=70mA, Max Supply Voltage=5.5V, Min Operating Temperature=-40°C, Min Supply Voltage=4.5V, Package Quantity=2500, Contact Plating=Gold, Data Rate=1Mbps, Interface=CAN, Lead Free="Lead Free", Mount="Surface Mount", Nominal Supply Current=70mA, Number of Pins=8, Number of Transceivers=1, Packaging="Tape and Reel", Propagation Delay=250ns, Radiation Hardening=No, Turn-On Delay Time=250ns
X1: library part CMP-00079-3, "8MHz ±30ppm Crystal 16pF 80 Ohms 4-SMD, No Lead", Case/Package=CSMD, ESR (Equivalent Series Resistance)=80R, Frequency=8MHz, Frequency Stability=50ppm, Load Capacitance=16pF, Max Operating Temperature=70°C, Min Operating Temperature=-20°C, Depth=5.2mm, Length=7.5mm, Number of Pins=4, Packaging="Tape and Reel"

## Via types
v1: diameter 0.6, hole 0.3, Top Layer to Bottom Layer, 81 vias

## Nets (pads, with @x,y where several pads share a name; then routed paths per layer and width w, separated by ;. In a path a pad name is that pad's centre, name@x,y a point inside that pad or via, vN(x,y) a via of type N, cw(c..) or ccw(c..) an arc to the next point about the centre after c; other vN are vias at no path point)
3V3: C2.1 C3.2 C4.2 C5.2 C6.2 C7.2 C8.2 C9.2 C10.2 C11.2 C16.2 C18.2 C22.2 C26.1 C27.2 CD1.4 CN3.2 FB1.1 JP3.1 LCD1.2 LCD1.22 R1.2 R6.2 R7.2 R8.2 R9.2 R10.2 R11.1 R17.2 R18.2 R19.2 R20.2 R21.2 R22.2 U1.10 U2.6 U2.11 U2.19 U2.28 U2.50 U2.75 U2.100 U3.5 U4.5 | length 434.7
  Top Layer w0.305: v1(16.027,55.804) 16.637,55.804 ; v1(16.142,23.165) 16.277,23.3 16.277,25.706 R11.1 18.583,25.842 18.644,25.781 U3.5 ; v1(19.577,55.842) 19.577,53.32 20.841,52.056 R7.2 ; R10.2 21.375,42.696 21.077,42.993 21.077,45.112 16.573,49.616 R8.2 16.573,54.481 16.637,54.545 16.637,55.804 ; CN3.2 20.539,59.63 18.783,59.63 17.878,58.724 cw(c16.7,58.331) 17.345,57.27 16.637,56.562 16.637,55.804 ; v1(23.127,55.88) 23.311,55.695 23.311,54.826 25.084,53.053 R6.2 ; v1(24.194,23.165) 26.264,23.165 36.754,12.675 ; v1(36.373,11.671) 36.373,12.293 36.754,12.675 ; C9.2 37.008,29.618 38.602,28.024 U2.6 41.202,28.001 42.027,28.001 ; FB1.1 38.342,11.087 36.754,12.675 ; C8.2 39.478,22.88 39.905,22.453 39.905,21.973 40.332,21.546 41.157,21.546 U2.19 41.202,21.501 42.027,21.501 43.752,19.777 v1@43.752,19.677 ; U2.11@41.18,25.501 U2.11 41.202,25.546 42.027,25.546 42.307,25.826 42.307,27.721 42.027,28.001 ; C10.2 42.182,33.166 42.705,32.644 U2.100 42.705,28.678 42.027,28.001 ; v1(43.568,19.677) v1@43.752,19.677 ; U2.28 43.727,17.021 43.727,19.534 43.752,19.558 v1@43.752,19.677 ; JP3.1 v1@49.57,60.439 ; v1(49.57,60.273) v1@49.57,60.439 ; R20.2 R22.2 50.863,46.507 52.298,47.942 53.338,47.942 54.773,49.377 R1.2 ; C27.2 53.989,62.126 52.303,60.439 v1@49.57,60.439 ; U2.50 U2.50@54.705,16.445 ; U2.75@55.732,30.551 55.759,30.524 U2.75 58.351,30.524 59.35,31.523 62.228,31.523 64.884,28.867 v1(64.884,25.679) ; C7.2 57.016,13.6 56.856,13.76 56.756,13.76 54.705,15.812 U2.50@54.705,16.445 ; v1(59.322,21.641) 59.817,21.641 60.002,21.825 60.559,21.825 61.265,22.531 C4.2 C5.2 C6.2 ; C11.2 60.521,12.872 C3.2 ; U1.10 62.778,40.696 63.475,39.999 C26.1 66.029,38.898 v1(66.992,37.935) ; CD1.4 63.513,49.162 63.513,49.8 69.007,55.294 C22.2 ; v1(63.919,59.906) 64.18,59.906 64.572,60.298 C16.2 72.504,55.307 C22.2 ; U4.5 75.379,21.026 C18.2 76.231,22.191 76.231,23.457 76.053,23.635 74.577,23.635 74.37,23.428 74.37,23.151 68.833,17.615 61.441,17.615 61.112,17.286 61.112,17.109 60.521,16.518 C3.2 ; LCD1.2 88.049,17.272 88.049,27.224 82.271,33.001 82.271,41.048 81.791,41.529 R19.2 75.596,41.573 75.596,47.048 R17.2 75.552,52.259 73.215,54.596 73.215,54.846 72.767,55.294 C22.2 ; U2.50@54.705,16.445 54.732,16.418 C3.2
  Bottom Layer w0.305: v1(16.142,23.165) 16.148,23.158 24.187,23.158 v1(24.194,23.165) ; v1(23.127,55.88) 23.089,55.842 v1(19.577,55.842) 16.066,55.842 v1(16.027,55.804) 3.823,55.804 LCD1.22 2.864,54.197 3.478,54.197 3.566,54.108 12.681,54.108 14.376,52.413 27.255,52.413 29.843,49.825 34.969,49.825 35.696,50.552 35.696,52.032 36.481,52.816 40.049,52.816 40.776,52.089 40.776,50.089 41.04,49.825 43.11,49.825 49.57,56.285 v1(49.57,60.273) 49.754,60.09 63.735,60.09 v1(63.919,59.906) ; v1(36.373,11.671) 46.059,11.671 47.249,12.862 49.066,12.862 49.529,13.324 49.529,18.448 ; v1(43.568,19.677) 44.797,18.448 49.529,18.448 ; v1(64.884,25.679) 60.909,21.704 59.88,21.704 59.817,21.641 ; v1(66.992,37.935) 64.786,37.935 61.877,40.843 60.61,40.843 59.95,40.184 59.95,31.838 60.431,31.357 60.431,23.011 59.322,21.902 v1(59.322,21.641) 59.817,21.641 ; 49.529,18.448 52.614,18.448 54.628,16.434 v1(58.864,16.434) 59.817,17.386 59.817,21.641
5V: C1.1 C19.2 C20.2 CN1.1 CN4.1 D3.K R2.1 U3.1 U3.3 U4.3 | length 380.7
  Top Layer w0.305: D3.K 25.565,65.062 24.913,65.714 16.638,65.714 11.265,60.342 11.265,26.569 17.004,20.83 ; R2.1 25.28,27.8 C1.1 25.16,27.681 U3.3 22.265,27.681 21.627,27.042 21.627,26.419 22.265,25.781 22.598,25.781 U3.1 22.598,25.647 22.265,25.647 21.82,25.647 17.004,20.83 ; U4.3 78.943,26.176 82.298,22.82 C19.2 83.604,23.887 84.52,24.803 84.52,26.197 ; C20.2 84.52,26.197 ; 17.004,20.83 15.992,19.819 15.992,18.657 16.813,17.835 23.811,17.835 25.213,19.238 CN1.1 26.612,17.94 26.612,9.419 32.783,3.248 74.051,3.248 78.016,7.214 79.162,7.214 81.258,9.309 82.756,9.309 87.022,13.575 87.022,15.073 87.617,15.669 87.617,23.1 84.52,26.197
  Top Layer w1.5: v1(25.314,4.608) CN1.1
  Bottom Layer w1.5: v1(25.314,4.608) 27.984,1.938 30.954,1.938 31.012,1.88 83.388,1.88 87.49,5.982 87.49,61.034 86.535,61.989 44.654,61.989 42.075,59.411 CN4.1
5V_DEBUG: CN3.1 D3.A | length 4.2
  Top Layer w0.305: CN3.1 24.367,60.917 D3.A
BOOT0: JP3.2 R15.2 U2.94 | length 30.7
  Top Layer w0.305: U2.94 45.727,32.071 45.727,34.564 v1(45.872,34.709) ; v1(45.961,49.492) 45.858,49.595 45.858,52.842 46.661,53.645 R15.2 46.838,53.772 JP3.2
  Bottom Layer w0.305: v1(45.872,34.709) 40.727,39.855 40.727,44.257 v1(45.961,49.492)
CAN2_N: CN2.2 JP2.2 R13.1 TVS1.2 U4.6 | length 15.4
  Top Layer w0.381: TVS1.2 73.204,15.925 78.421,15.925 JP2.2 JP2.2@78.52,15.951 ; CN2.2 78.446,12.901 79.399,13.854 79.399,14.754 79.4,14.755 79.4,15.071 JP2.2@78.52,15.951 ; U4.6 78.943,20.526 79.311,20.158 79.311,19.075 79.087,18.852 79.038,18.852 78.778,18.592 R13.1 78.778,18.492 79.038,18.232 79.087,18.232 79.311,18.009 79.311,17.207 79.4,17.118 79.4,16.802 78.55,15.951 JP2.2@78.52,15.951
CAN2_P: CN2.1 JP2.1 R13.2 TVS2.1 U4.7 | length 15.3
  Top Layer w0.381: U4.7 80.213,20.526 79.946,20.258 79.946,19.075 80.169,18.852 80.219,18.852 80.478,18.592 R13.2 80.478,18.492 80.219,18.232 80.169,18.232 79.946,18.009 79.946,17.47 80.035,17.381 80.035,16.802 80.886,15.951 JP2.1@80.916,15.951 ; CN2.1 80.986,12.967 80.034,13.919 80.034,14.491 80.035,14.492 80.035,15.071 JP2.1@80.916,15.951 ; TVS2.1 86.154,15.936 81.003,15.936 JP2.1 JP2.1@80.916,15.951
GND: C1.2 C2.2 C3.1 C4.1 C5.1 C6.1 C7.1 C8.1 C9.1 C10.1 C11.1 C12.1 C13.1 C14.1 C15.1 C16.1 C17.1 C18.1 C19.1 C20.1 C21.1 C22.1 C24.1 C25.1 C26.2 C27.1 CD1.6 CD1.10 CD1.11 CD1.12 CD1.13 CD1.14 CN1.2 CN3.5 CN3.10 CN4.4 D1.1 D2.1 D4.1 D5.1 D6.1 LCD1.1 LCD1.21 R5.2 R15.1 SW1.3 SW1.4 SW2.3 SW2.4 TVS1.1 TVS2.2 U1.5 U2.10 U2.20 U2.27 U2.74 U2.99 U3.2 U4.2 X1.2 X1.4 | length 2.2
  Top Layer w0.305: 92.995,57.988 ccw(c92.78,58.204) 93.001,57.994 cw(c93.98,57.061) 94.985,57.966 ; 95.015,57.933 ccw(c95.232,58.147) 95.016,57.932
  other v1: 81.216,5.283 79.662,9.741 57.823,10.147 36.946,21.399 66.446,21.476 13.487,29.916 30.353,38.445 14.791,39.688 60.657,39.802 61.671,46.012 70.115,50.642 62.039,52.819
LCD_RST: C14.2 R9.1 SW1.1 SW1.2 | length 11.4
  Top Layer w0.305: SW1.1 84.906,41.278 84.408,41.776 83.344,41.776 82.295,42.824 82.245,42.824 C14.2 82.345,46.888 84.245,48.788 84.446,48.788 84.906,49.248 SW1.2
LED_BLUE: R16.1 U2.37 | length 9.9
  Top Layer w0.305: U2.37 48.205,13.998 48.068,13.861 48.068,11.941 48.56,11.449 48.601,11.449 50.96,9.089 50.96,8.822 51.208,8.574 R16.1
LED_GREEN: R14.1 U2.36 | length 8.8
  Top Layer w0.305: U2.36 47.684,16.979 47.684,14.088 47.636,14.04 47.636,11.688 48.616,10.709 R14.1
LED_RED: R12.1 U2.35 | length 9.3
  Top Layer w0.305: R12.1 45.479,10.354 47.205,12.08 U2.35
NetC12_2: C12.2 C13.2 FB1.2 U2.21 U2.22 | length 16.9
  Top Layer w0.305: C12.2 39.381,7.901 39.889,8.409 C13.2 40.116,8.737 FB1.2 40.116,15.736 42.307,17.926 42.307,19.721 42.027,20.001 41.202,20.001 U2.22 U2.21
NetCD1_1: CD1.1 R17.1 U1.3 U2.78 | length 53.4
  Top Layer w0.305: U2.78 53.705,34.995 55.899,37.189 56.318,37.189 57.923,35.585 71.85,35.585 72.797,36.532 72.797,38.01 v1(72.009,38.798) ; U1.3 63.501,42.038 63.845,42.038 65.036,43.23 65.036,43.52 v1(66.294,44.779) ; CD1.1 66.565,48.474 66.813,48.226 68.122,48.226 69.371,46.977 v1(70.942,46.977) 73.738,46.977 R17.1
  Bottom Layer w0.305: v1(66.294,44.779) 68.743,44.779 v1(70.942,46.977) 70.942,45.796 72.073,44.666 72.073,38.862 v1(72.009,38.798)
NetCD1_2: CD1.2 R18.1 U1.2 U2.79 | length 50.5
  Top Layer w0.305: U2.79 53.205,34.005 53.262,34.062 53.262,35.163 55.72,37.621 56.497,37.621 58.102,36.017 70.715,36.017 71.286,36.588 71.286,36.782 71.468,36.964 v1(71.756,36.964) ; U1.2 63.501,41.538 66.469,41.538 v1(66.561,41.631) ; CD1.2 65.713,48.666 65.713,48.028 69.507,44.234 v1(71.031,44.234) 73.789,44.234 R18.1
  Bottom Layer w0.305: v1(71.031,44.234) 68.428,41.631 v1(66.561,41.631) 71.228,36.964 v1(71.756,36.964)
NetCD1_3: CD1.3 R19.1 U1.1 U2.83 | length 53.9
  Top Layer w0.305: v1(50.102,38.227) 50.102,34.61 51.205,33.507 U2.83@51.205,32.671 ; v1(55.639,39.091) 58.28,36.449 70.536,36.449 70.714,36.627 70.714,41.131 ; U1.1 65.083,40.991 65.485,40.589 70.172,40.589 70.714,41.131 ; CD1.3 64.613,48.666 64.613,48.028 71.112,41.529 ; R19.1 71.112,41.529 ; 70.714,41.131 71.112,41.529
  Bottom Layer w0.305: v1(50.102,38.227) 54.775,38.227 v1(55.639,39.091)
NetCD1_5: CD1.5 R20.1 U1.8 U2.80 | length 29.5
  Top Layer w0.305: U2.80 52.705,34.116 52.83,34.241 52.83,36.465 52.563,36.732 R20.1 53.975,41.021 55.817,42.864 ; U1.8 58.331,41.491 58.013,41.173 57.76,41.173 56.248,42.685 56.07,42.864 55.817,42.864 ; CD1.5 61.917,48.666 61.917,48.028 60.803,46.914 59.867,46.914 55.817,42.864
NetCD1_7: CD1.7 R21.1 U1.7 U2.65 | length 40.2
  Top Layer w0.305: R21.1 52.652,43.726 v1(55.207,43.726) 55.415,43.726 59.717,48.028 59.717,48.666 CD1.7 ; U2.65 56.252,25.501 59.605,25.501 v1(59.617,25.514) ; v1(57.713,42.692) 57.975,42.692 58.478,42.189 58.894,42.189 59.092,41.991 U1.7
  Bottom Layer w0.305: v1(55.207,43.726) 57.296,41.637 57.557,41.637 ; v1(57.713,42.692) 57.557,42.535 57.557,41.637 ; v1(59.617,25.514) 59.39,25.514 59.018,25.885 59.018,41.459 58.84,41.637 57.557,41.637
NetCD1_8: CD1.8 R22.1 U1.6 U2.66 | length 39.2
  Top Layer w0.305: R22.1 52.64,46.38 53.789,47.53 v1(55.562,47.53) 58.209,47.53 58.617,47.938 58.617,48.666 CD1.8 ; U2.66 58.602,26.024 58.781,26.202 58.781,26.206 58.959,26.384 v1(59.725,26.384) ; v1(58.752,44.186) 60.448,42.491 U1.6
  Bottom Layer w0.305: v1(55.562,47.53) 55.562,46.05 57.399,44.214 58.725,44.214 v1(58.752,44.186) 59.519,43.42 59.519,31.659 59.725,31.453 v1(59.725,26.384)
NetCD1_9: CD1.9 JP4.1 R1.1 | length 7.4
  Top Layer w0.305: R1.1 53.073,49.477 53.988,50.391 ; JP4.1 53.988,50.391 ; CD1.9 54.071,50.474 53.988,50.391
NetCN4_2: CN4.2 U2.1 | length 21.8
  Top Layer w0.305: v1(40.54,32.679) 40.604,32.615 40.604,30.551 40.631,30.524 U2.1
  Bottom Layer w0.305: CN4.2 39.535,33.655 40.511,32.679 v1(40.54,32.679)
NetCN4_3: CN4.3 U2.5 | length 26
  Top Layer w0.305: v1(37.116,33.157) 37.346,32.927 37.607,32.927 38.223,32.311 38.733,32.311 39.124,31.92 39.124,29.754 40.332,28.546 41.157,28.546 U2.5
  Bottom Layer w0.305: CN4.3 36.995,34.121 37.641,33.474 37.346,33.179 37.139,33.179 v1(37.116,33.157)
NetD1_2: D1.2 R2.2 | length 2
  Top Layer w0.305: R2.2 28.302,27.679 28.302,26.016 D1.2
NetD2_2: D2.2 R11.2 | length 1.9
  Top Layer w0.305: R11.2 14.943,25.872 14.943,27.643 D2.2
NetD4_2: D4.2 R12.2 | length 1.6
  Top Layer w0.305: D4.2 45.422,5.696 45.422,7.169 R12.2
NetD5_2: D5.2 R14.2 | length 1.6
  Top Layer w0.305: D5.2 48.603,7.099 R14.2
NetD6_2: D6.2 R16.2 | length 1.6
  Top Layer w0.305: R16.2 51.422,6.96 D6.2
NetJP1_1: JP1.1 R3.1 U2.52 | length 35.1
  Top Layer w0.305: U2.52@56.852,19.001 57.077,19.001 57.123,18.956 66.749,18.956 74.952,27.159 74.952,28.511 74.52,28.943 74.52,30.202 74.952,30.633 74.952,31.323 75.159,31.529 78.401,31.529 79.553,30.377 JP1.1 80.989,30.377 81.463,30.851 R3.1
NetJP1_2: JP1.2 R4.1 U2.51 | length 30.7
  Top Layer w0.305: U2.51 66.928,18.524 76.113,27.709 76.113,27.961 74.952,29.122 74.952,30.023 75.248,30.318 76.305,30.318 ; R4.1 75.805,30.877 76.305,30.377 JP1.2
NetJP4_2: JP4.2 U2.55 | length 69.9
  Top Layer w0.305: U2.55 63.296,20.524 v1(63.334,20.562)
  Bottom Layer w0.305: JP4.2 72.887,56.158 78.067,50.978 78.067,35.294 v1(63.334,20.562)
NetLCD1_23: LCD1.23 U2.88 | length 67.1
  Top Layer w0.305: v1(43.764,30.348) 43.764,30.149 44.107,29.806 44.826,30.525 48.006,30.525 48.682,31.201 48.682,32.026 U2.88
  Bottom Layer w0.305: LCD1.23 27.076,51.981 36.094,42.964 36.094,42.711 32.438,39.055 32.005,39.055 31.826,38.876 31.826,36.974 38.904,29.896 40.978,29.896 41.43,30.348 v1(43.764,30.348)
NetLCD1_24: LCD1.24 U2.60 | length 77.1
  Top Layer w0.305: U2.60@56.207,23.001 U2.60 56.252,23.001 57.46,23.001 57.89,22.572 v1(58.365,22.572)